# EAGLE board 8led-indicator (EAGLE 9.5.1)
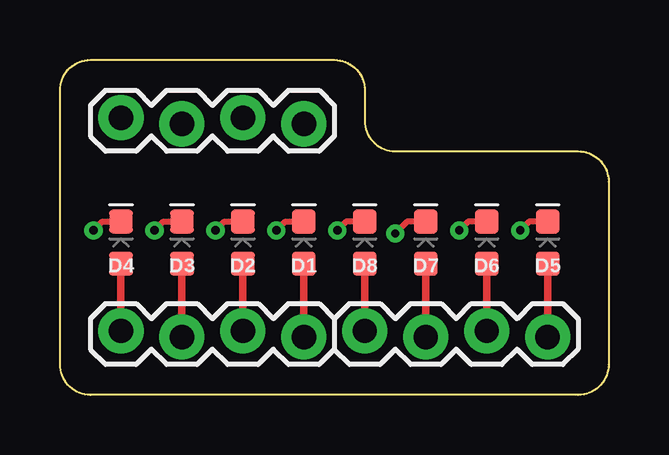
[diagram p0: board, top side]
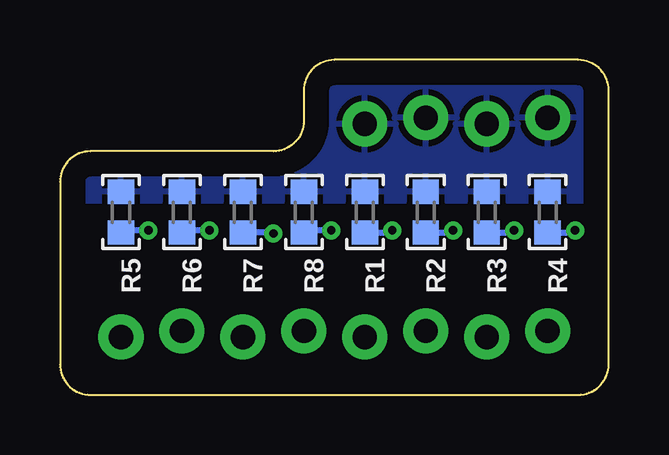
[diagram p1: board, bottom side, seen from below]

Size 22.86 x 13.97 mm. Coordinates in mm from the lower left corner, seen from the top.
Outline: 0,1.27 0,12.7 arc-90 1.27,13.97 11.43,13.97 arc-90 12.7,12.7 12.7,11.43 arc90 13.97,10.16 21.59,10.16 arc-90 22.86,8.89 22.86,1.27 arc-90 21.59,0 1.27,0 arc-90 0,1.27
Copper layers (1*16): Top 0.035mm / dielectric 1.5mm / Bottom 0.035mm
Design rules "default": minimum track width 6mil, minimum drill 0.35mm, track to track 6mil, track to pad 6mil, pad to pad 6mil, via to via 6mil, smd to smd 6mil, copper to edge 40mil, drill to drill 6mil, minimum pad ring 10mil, minimum via ring 8mil, stop-mask expansion 4mil, vias tented up to drill 0mil, thermal gap 10mil

## Footprints (pad centres in the part's own frame; a part is rotated, then mirrored left to right if it is on the bottom)
LED-0603 = smd 1 x 1: A -0.877,0; C 0.877,0
1X04_LOCK = drill 1.016 pad 1.88: 1 0,0.127; 2 2.54,-0.127; 3 5.08,0.127; 4 7.62,-0.127
R0603 = smd 1 x 1.1: 1 -0.85,0; 2 0.85,0

## Placement (x,y rotation side)
D1  [LED-0603]  10.16,6.35 90 top
D2  [LED-0603]  7.62,6.35 90 top
D3  [LED-0603]  5.08,6.35 90 top
D4  [LED-0603]  2.54,6.35 90 top
D5  [LED-0603]  20.32,6.35 90 top
D6  [LED-0603]  17.78,6.35 90 top
D7  [LED-0603]  15.24,6.35 90 top
D8  [LED-0603]  12.7,6.35 90 top
J1  [1X04_LOCK]  2.54,2.54 0 top
J2  [1X04_LOCK]  12.7,2.54 0 top
J3  [1X04_LOCK]  2.54,11.43 0 top
R1  [R0603]  10.16,7.62 270 bottom
R2  [R0603]  7.62,7.62 270 bottom
R3  [R0603]  5.08,7.62 270 bottom
R4  [R0603]  2.54,7.62 270 bottom
R5  [R0603]  20.32,7.62 270 bottom
R6  [R0603]  17.78,7.62 270 bottom
R7  [R0603]  15.24,7.62 270 bottom
R8  [R0603]  12.7,7.62 270 bottom

## Library data of the parts
D1-D8 = SparkFun-LED
J1-J3 = SparkFun-Connectors; PROD_ID: CONN-09696
R1-R8 = 0000-master

## Nets
GND: J3.1 J3.2 J3.3 J3.4 R1.1 R2.1 R3.1 R4.1 R5.1 R6.1 R7.1 R8.1
N$1: D1.A J1.4
N$2: D2.A J1.3
N$3: D3.A J1.2
N$4: D4.A J1.1
N$5: D1.C R1.2
N$6: D2.C R2.2
N$7: D3.C R3.2
N$8: D4.C R4.2
N$9: D5.A J2.4
N$10: D6.A J2.3
N$11: D7.A J2.2
N$12: D8.A J2.1
N$13: D5.C R5.2
N$14: D6.C R6.2
N$15: D7.C R7.2
N$16: D8.C R8.2

## Tracks (layer width: path | path; a pad name or v marks a point on that pad's centre or on a via)
GND
  pour Bottom: -1.27,15.24 -1.27,8 22.86,8 22.86,15.24
N$1
  Top 0.305: D1.A J1.4
N$2
  Top 0.305: D2.A J1.3
N$3
  Top 0.305: D3.A J1.2
N$4
  Top 0.305: D4.A J1.1
N$5  (via drill 0.35)
  Top 0.254: v9.02,6.86 9.39,7.23 D1.C
  Bottom 0.254: 9.74,6.77 R1.2 9.11,6.77 v9.02,6.86
N$6  (via drill 0.35)
  Top 0.254: v6.48,6.86 6.85,7.23 D2.C
  Bottom 0.254: 7.07,6.77 R2.2 6.57,6.77 v6.48,6.86
N$7  (via drill 0.35)
  Top 0.254: v3.94,6.86 4.31,7.23 D3.C
  Bottom 0.254: 4.66,6.77 R3.2 4.03,6.77 v3.94,6.86
N$8  (via drill 0.35)
  Top 0.254: v1.39,6.86 1.76,7.23 D4.C
  Bottom 0.254: R4.2 1.48,6.77 v1.39,6.86
N$9
  Top 0.305: D5.A J2.4
N$10
  Top 0.305: D6.A J2.3
N$11
  Top 0.305: D7.A J2.2
N$12
  Top 0.305: D8.A J2.1
N$13  (via drill 0.35)
  Top 0.254: D5.C 19.55,7.23 v19.18,6.86
  Bottom 0.254: v19.18,6.86 20.23,6.86 R5.2
N$14  (via drill 0.35)
  Top 0.254: D6.C 17.01,7.23 v16.64,6.86
  Bottom 0.254: v16.64,6.86 17.69,6.86 R6.2
N$15  (via drill 0.35)
  Top 0.254: D7.C 14.47,7.23 v13.97,6.73
  Bottom 0.254: v13.97,6.73 14.01,6.77 R7.2
N$16  (via drill 0.35)
  Top 0.254: D8.C 11.93,7.23 v11.56,6.86
  Bottom 0.254: v11.56,6.86 12.61,6.86 R8.2